# Altium PCB MCU052A_PCB.PcbDoc (part 2 of 2)
Units mil, origin at the board's own origin, x right, y up, seen from the top; angles counter-clockwise.
Board outline 2300 x 1400 mil, 4 copper layers (Top Layer, VCC Layer, GND Layer, Bottom Layer), stack 62.4 mil thick; 49 components, 52 nets, 135 pads, 118 vias.
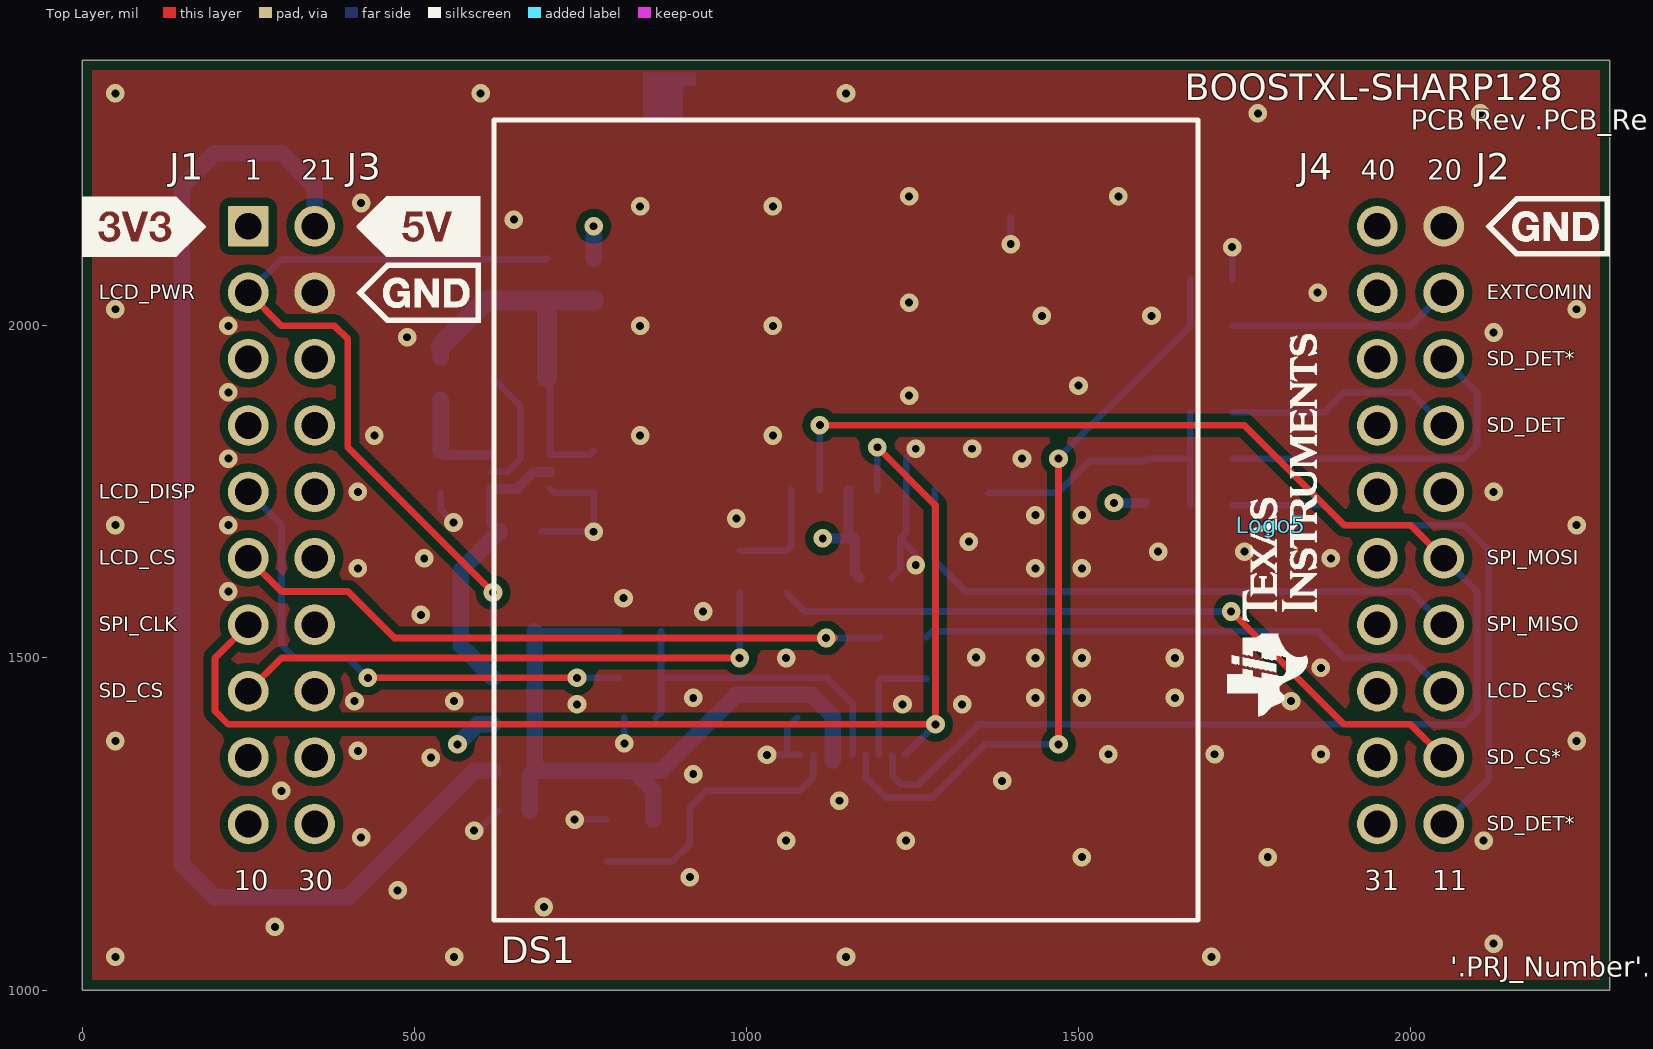
[diagram p0: Top Layer view]

## Silkscreen, mask and mechanical layers (free items; w line width, h text height) (continued)
M12 Stackup: (continued)
  text "Name" at 4514.91,6142.5 h60
  text "Material" at 5444.66,6142.5 h60
  text "Thickness" at 6304.42,6142.5 h60
  text "Constant" at 6954.26,6142.5 h60
  text "Board Layer Stack" at 7524.12,6142.5 h60
  text "1" at 4105,6022.5 h60
  text "Top Overlay" at 4514.91,6022.5 h60
  text "2" at 4105,5902.5 h60
  text "Top Solder" at 4514.91,5902.5 h60
  text "Solder Resist" at 5444.66,5902.5 h60
  text "0.40mil" at 6304.42,5902.5 h60
  text "3.5" at 6954.26,5902.5 h60
  text "3" at 4105,5782.5 h60
  text "Top Layer" at 4514.91,5782.5 h60
  text "Copper" at 5444.66,5782.5 h60
  text "1.40mil" at 6304.42,5782.5 h60
  text "4" at 4105,5662.5 h60
  text "Dielectric 2" at 4514.91,5662.5 h60
  text "FR-4" at 5444.66,5662.5 h60
  text "8.40mil" at 6304.42,5662.5 h60
  text "4.2" at 6954.26,5662.5 h60
  text "5" at 4105,5542.5 h60
  text "VCC Layer" at 4514.91,5542.5 h60
  text "Copper" at 5444.66,5542.5 h60
  text "1.40mil" at 6304.42,5542.5 h60
  text "6" at 4105,5422.5 h60
  text "Dielectric1" at 4514.91,5422.5 h60
  text "FR-4" at 5444.66,5422.5 h60
  text "40.00mil" at 6304.42,5422.5 h60
  text "4.2" at 6954.26,5422.5 h60
  text "7" at 4105,5302.5 h60
  text "GND Layer" at 4514.91,5302.5 h60
  text "Copper" at 5444.66,5302.5 h60
  text "1.40mil" at 6304.42,5302.5 h60
  text "8" at 4105,5182.5 h60
  text "Dielectric 3" at 4514.91,5182.5 h60
  text "FR-4" at 5444.66,5182.5 h60
  text "8.40mil" at 6304.42,5182.5 h60
  text "4.2" at 6954.26,5182.5 h60
  text "9" at 4105,5062.5 h60
  text "Bottom Layer" at 4514.91,5062.5 h60
  text "Copper" at 5444.66,5062.5 h60
  text "1.40mil" at 6304.42,5062.5 h60
  text "10" at 4105,4942.5 h60
  text "Bottom Solder" at 4514.91,4942.5 h60
  text "Solder Resist" at 5444.66,4942.5 h60
  text "0.40mil" at 6304.42,4942.5 h60
  text "3.5" at 6954.26,4942.5 h60
  text "11" at 4105,4822.5 h60
  text "Bottom Overlay" at 4514.91,4822.5 h60
  text ".Layer_Name" at 577,-858.49 h60
M13 Component Bodies Top:
  text ".Layer_Name" at 577,-858.49 h60
M14 Component Bodies Bottom:
  text ".Layer_Name" at 577,-858.49 h60
M15 Courtyards Top:
  text ".Layer_Name" at 577,-858.49 h60
M16 Courtyards Bottom:
  text ".Layer_Name" at 577,-858.49 h60
Drill Drawing:
  lines w10: 4112.93,2071.68 4168.18,2071.68 4168.18,2126.93 4112.93,2126.93 4112.93,2071.68 ; 4112.93,2209.81 4126.74,2209.81 4140.56,2196 4154.37,2209.81 4168.18,2209.81 4154.37,2223.63 4168.18,2237.44 4154.37,2237.44 4140.56,2251.25 4126.74,2237.44 4112.93,2237.44 4126.74,2223.63 4112.93,2209.81
  lines w12: 4062.84,2034.38 7294.33,2034.38 ; 4062.84,2283.02 7294.33,2283.02 ; 4400.7,1910.06 4400.7,2407.34 ; 4732.7,1910.06 4732.7,2407.34 ; 5369.27,1910.06 5369.27,2407.34 ; 5628.41,1910.06 5628.41,2407.34 ; 6003.57,1910.06 6003.57,2407.34 ; 6727.9,1910.06 6727.9,2407.34 ; 4062.84,1910.06 7294.33,1910.06 7294.33,2407.34 4062.84,2407.34 4062.84,1910.06
  text "Symbol" at 4137.43,2320.32 h72
  text "Quantity" at 4438,2320.32 h72
  text "Finished Hole Size" at 4770,2320.32 h72
  text "Plated" at 5406.56,2320.32 h72
  text "Hole Type" at 5665.7,2320.32 h72
  text "Drill Layer Pair" at 6040.86,2320.32 h72
  text "Hole Tolerance" at 6765.19,2320.32 h72
  text "118" at 4438,2196 h60
  text "12.00mil (0.305mm)" at 4770,2196 h60
  text "PTH" at 5406.56,2196 h60
  text "Round" at 5665.7,2196 h60
  text "Top Layer - Bottom Layer" at 6040.86,2196 h60
  text "40" at 4438,2071.68 h60
  text "40.16mil (1.020mm)" at 4770,2071.68 h60
  text "PTH" at 5406.56,2071.68 h60
  text "Round" at 5665.7,2071.68 h60
  text "Top Layer - Bottom Layer" at 6040.86,2071.68 h60
  text "158 Total" at 4438,1947.36 h60
  text ".Layer_Name" at 577,-858.49 h60
M17 Embedded Cavity:
  text ".Layer_Name" at 577,-858.49 h60
M18 Embedded Assembly:
  text ".Layer_Name" at 577,-858.49 h60
M19 Embedded Keepout:
  text ".Layer_Name" at 577,-858.49 h60

## Dimensions
0,1000 to 2300,990 on M2 Board Dimensions
0,1000 to -10,2400 on M2 Board Dimensions
0,-400 to 1000,-400 on M2 Board Dimensions

## Text inside footprints (layer, text, board x,y; h text height)
J1/J3: Top Overlay "21" at 330,2220 h30; Top Overlay "30" at 325,1150 h30; Top Overlay "1" at 245,2220 h30; Top Overlay "10" at 228,1150 h30; Top Overlay "J3" at 398.43,2220 h40; Top Overlay "J1" at 131.02,2220 h40
J2/J4: Top Overlay "40" at 1925,2220 h30; Top Overlay "31" at 1930,1150 h30; Top Overlay "11" at 2033,1150 h30; Top Overlay "20" at 2025,2220 h30; Top Overlay "J2" at 2098.43,2220 h40; Top Overlay "J4" at 1831.02,2220 h40
Logo3: Bottom Overlay "For evaluation only;" at 659.67,1097.01 h60; Bottom Overlay "not FCC approved for resale." at 772.05,1043.62 h60